# Altium PCB NEW_PCB_2021-09-05.pcbdoc
Units mm, origin at the board's own origin, x right, y up, seen from the top; angles counter-clockwise.
Board outline 36.8 x 33.13 mm, 2 copper layers (Top Layer, Bottom Layer); 1 components, 0 nets, 9 pads, 0 vias.
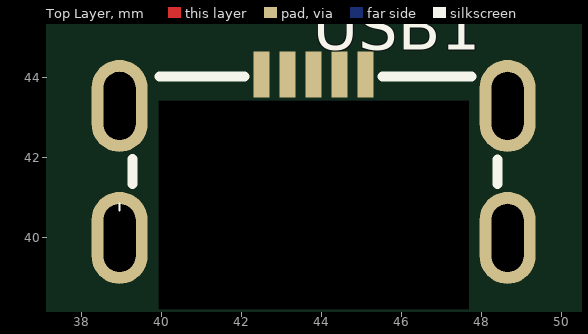
[diagram p0: Top Layer view]
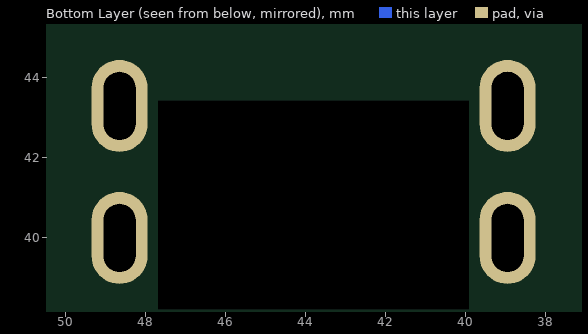
[diagram p1: Bottom Layer view, seen from below]

## Layer stack, top to bottom
Top Layer: signal copper (thickness not stored)
Dielectric: dielectric 0.32, FR-4, Dk 4.8
Bottom Layer: signal copper (thickness not stored)

## Board outline
62.2,25.4 25.4,25.4 25.4,58.527 62.2,58.527

## Components (designator, comment, footprint, x,y, rotation, side; value= is the part's Value field where it differs from the comment)
USB1 "MICRO-USB-SMD_MICRO-5P-P0.8" MICRO-USB-SMD_MICRO-5P-P0.8 43.8,42.027 r0 top

## Footprints (in the part's own frame and the unit in brackets; to place one, negate y for a bottom-side part, rotate by r counter-clockwise, add the part's x,y. Pads: shape width x height; smd on the part's side, far side on the other; paste and mask are expansions set on the pad)
MICRO-USB-SMD_MICRO-5P-P0.8 [mm]
  rect 0.4x1.15 smd: 1(-1.301,2.042) 2(-0.651,2.042) 3(0,2.042) 4(0.65,2.042) 5(1.3,2.042)
  oval 1.4x2.3 hole 0.8 slot 1.7 at 90 deg: SH1(-4.85,1.257) SH2(-4.85,-2.044) SH3(4.85,1.256) SH4(4.85,-2.044)
  Multi-Layer board cut-out: 3.885,1.384 -3.875,1.384 -3.875,-3.826 3.885,-3.826
  silkscreen extent -4.85,-1.36 4.6,2

## Nets (pads, with @x,y where several pads share a name; then routed paths per layer and width w, separated by ;. In a path a pad name is that pad's centre, name@x,y a point inside that pad or via, vN(x,y) a via of type N, cw(c..) or ccw(c..) an arc to the next point about the centre after c; other vN are vias at no path point)
pads on no net: USB1.1 USB1.2 USB1.3 USB1.4 USB1.5 USB1.SH1 USB1.SH2 USB1.SH3 USB1.SH4

## Silkscreen, mask and mechanical layers (free items; w line width, h text height)
Document:
  lines w0.003: 43.775,41.938 43.825,41.989